# EAGLE board inside (EAGLE 9.7.0)

Size 248.7 x 299.87 mm. Coordinates in mm from the lower left corner, seen from the top.
Outline: 0,0 248.7,0 248.7,299.87 0,299.87 0,0
Copper layers (1*16): Top 0.035mm / dielectric 1.5mm / Bottom 0.035mm
Design rules "default": minimum track width 6mil, minimum drill 0.35mm, track to track 6mil, track to pad 6mil, pad to pad 6mil, via to via 6mil, smd to smd 6mil, copper to edge 40mil, drill to drill 6mil, minimum pad ring 10mil, minimum via ring 8mil, stop-mask expansion 4mil, vias tented up to drill 0mil, thermal gap 10mil

## Footprints (pad centres in the part's own frame; a part is rotated, then mirrored left to right if it is on the bottom)
LED-RGB-5MM = drill 0.9: B 0.635,0.635; C -0.635,-0.635; G 1.905,-0.635; R -1.905,0.635
28015 = drill 1.016 long: 1 -2.54,0; 2 0,0; 3 2.54,0
RESAD1016W63L850D250B = drill 0.83 pad 1.43: 1 -5.08,0; 2 5.08,0
HA-06-SM065 = drill 1 pad 1.676: 1 -2.54,-2.54; 2 0,2.54; 3 2.54,-2.54
ARDUINO-UNO-R3-SHIELD = drill 1.016 pad 1.88: 3.3V 24.13,-2.54; 5V 24.13,0; A0 24.13,12.7; A1 24.13,15.24; A2 24.13,17.78; A3 24.13,20.32; A4 24.13,22.86; A5 24.13,25.4; AREF -24.13,-13.97; D2 -24.13,20.32; D3 -24.13,17.78; D4 -24.13,15.24; D5 -24.13,12.7; D6 -24.13,10.16; D7 -24.13,7.62; D8 -24.13,3.81; D9 -24.13,1.27; D10 -24.13,-1.27; D11 -24.13,-3.81; D12 -24.13,-6.35; D13 -24.13,-8.89; GND@0 24.13,2.54; GND@1 24.13,5.08; GND@2 -24.13,-11.43; IOREF 24.13,-7.62; NC 24.13,-10.16; RES 24.13,-5.08; RX -24.13,25.4; SCL -24.13,-19.05; SDA -24.13,-16.51; TX -24.13,22.86; VIN 24.13,7.62
JHD-162A = drill 1.016 long: 1 -19.05,0; 2 -16.51,0; 3 -13.97,0; 4 -11.43,0; 5 -8.89,0; 6 -6.35,0; 7 -3.81,0; 8 -1.27,0; 9 1.27,0; 10 3.81,0; 11 6.35,0; 12 8.89,0; 13 11.43,0; 14 13.97,0; 15 16.51,0; 16 19.05,0

## Placement (x,y rotation side)
D1  LED-RGBRCBG-PTH  [LED-RGB-5MM]  10.14,258.51 180 top
PING1  DISTANCE-SENSOR-3PIN  [28015]  177.65,118.81 180 top
R1  1k  [RESAD1016W63L850D250B]  13.95,268.67 270 top
R2  1k  [RESAD1016W63L850D250B]  8.87,268.67 270 top
R3  1k  [RESAD1016W63L850D250B]  6.33,268.67 270 top
R4  1k  [RESAD1016W63L850D250B]  209.38,181.08 90 top
R5  1k  [RESAD1016W63L850D250B]  122.49,8.97 90 top
R6  1k  [RESAD1016W63L850D250B]  235.93,9.39 90 top
RPOT1  250k  [HA-06-SM065]  178.9,201.4 0 top
U1  ARDUINO-UNO-R3-SHIELD  [ARDUINO-UNO-R3-SHIELD]  173.02,270.02 270 top
U2  LCD-16X2JHD-162A  [JHD-162A]  193.07,172.9 0 top

## Library data of the parts
D1 PING1 R1-R6 RPOT1 U1 U2 = Tinkercad

## Nets
D1_B: D1.B R2.2
D1_G: D1.G R3.2
D1_R: D1.R R1.2
R5_2: R5.2 R6.2
U1_5V: PING1.2 R4.2 RPOT1.1 U1.5V U2.2
U1_D2: U1.D2 U2.14
U1_D3: U1.D3 U2.13
U1_D4: U1.D4 U2.12
U1_D5: U1.D5 U2.11
U1_D6: U1.D6 U2.6
U1_D7: U1.D7 U2.4
U1_D8: PING1.3 U1.D8
U1_D9: R3.1 U1.D9
U1_D10: R2.1 U1.D10
U1_D11: R1.1 U1.D11
U1_GND: D1.C PING1.1 RPOT1.3 U1.GND@0 U1.GND@1 U1.GND@2 U2.1 U2.5 U2.16
U2_LED+: R4.1 U2.15
U2_VO: RPOT1.2 U2.3

## Tracks (layer width: path | path; a pad name or v marks a point on that pad's centre or on a via)
D1_B  (1 unrouted)
D1_G  (1 unrouted)
D1_R  (1 unrouted)
R5_2  (1 unrouted)
U1_5V  (4 unrouted)
U1_D2  (1 unrouted)
U1_D3  (1 unrouted)
U1_D4  (1 unrouted)
U1_D5  (1 unrouted)
U1_D6  (1 unrouted)
U1_D7  (1 unrouted)
U1_D8  (1 unrouted)
U1_D9  (1 unrouted)
U1_D10  (1 unrouted)
U1_D11  (1 unrouted)
U1_GND  (8 unrouted)
U2_LED+  (1 unrouted)
U2_VO  (1 unrouted)